# EAGLE board bend_it_board_v_2_E (EAGLE 9.3.1)
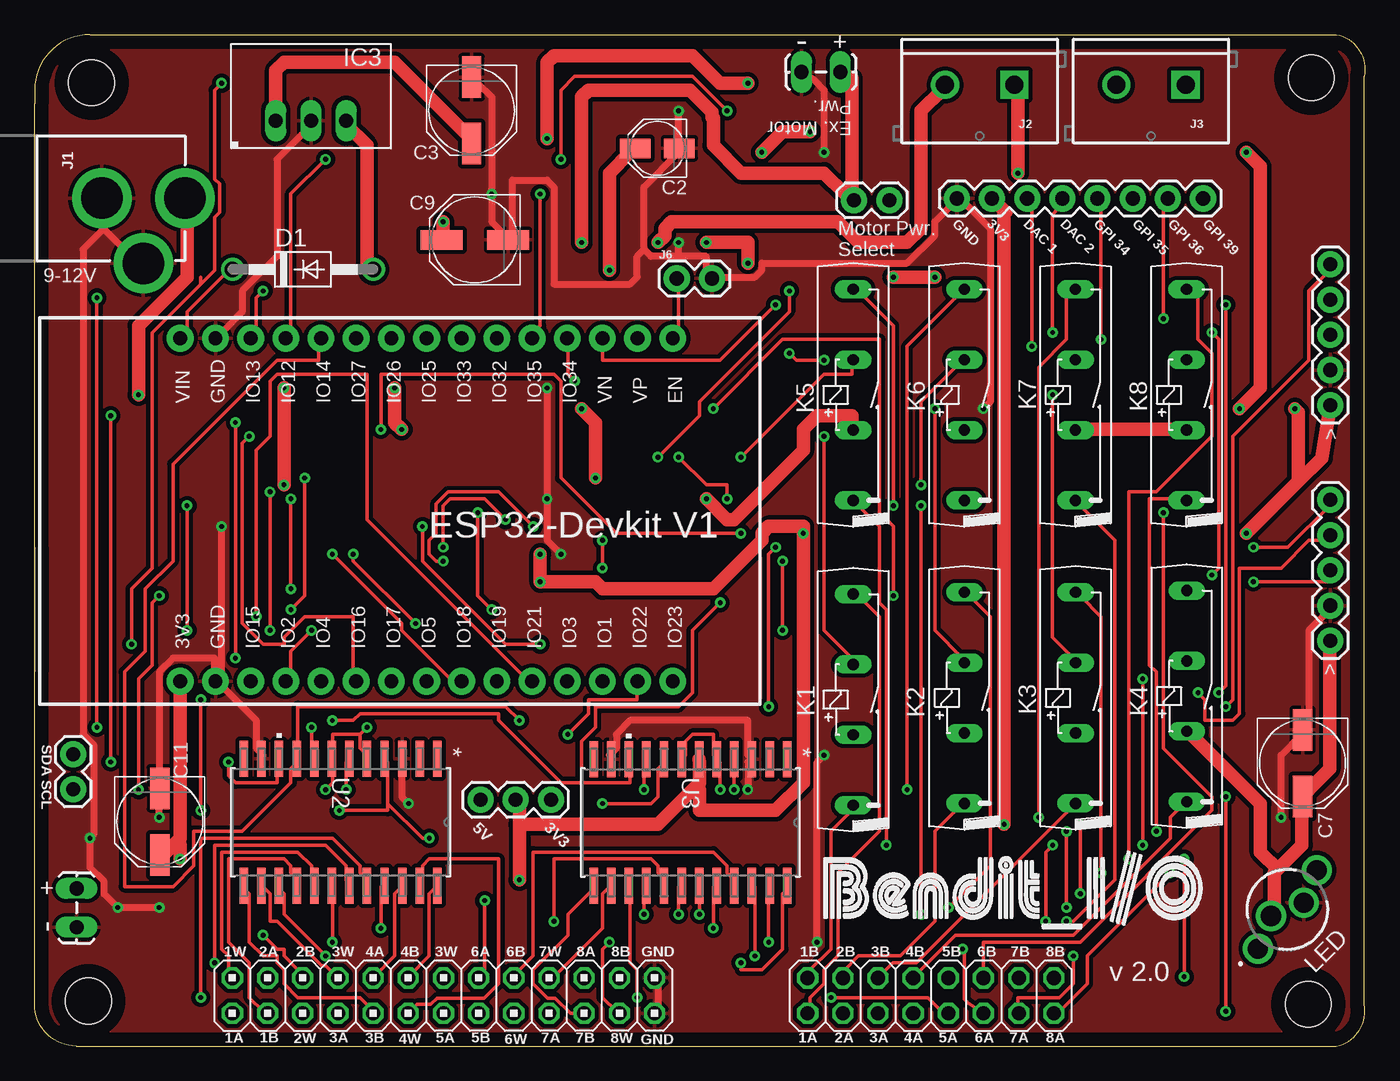
[diagram p0: board, top side]
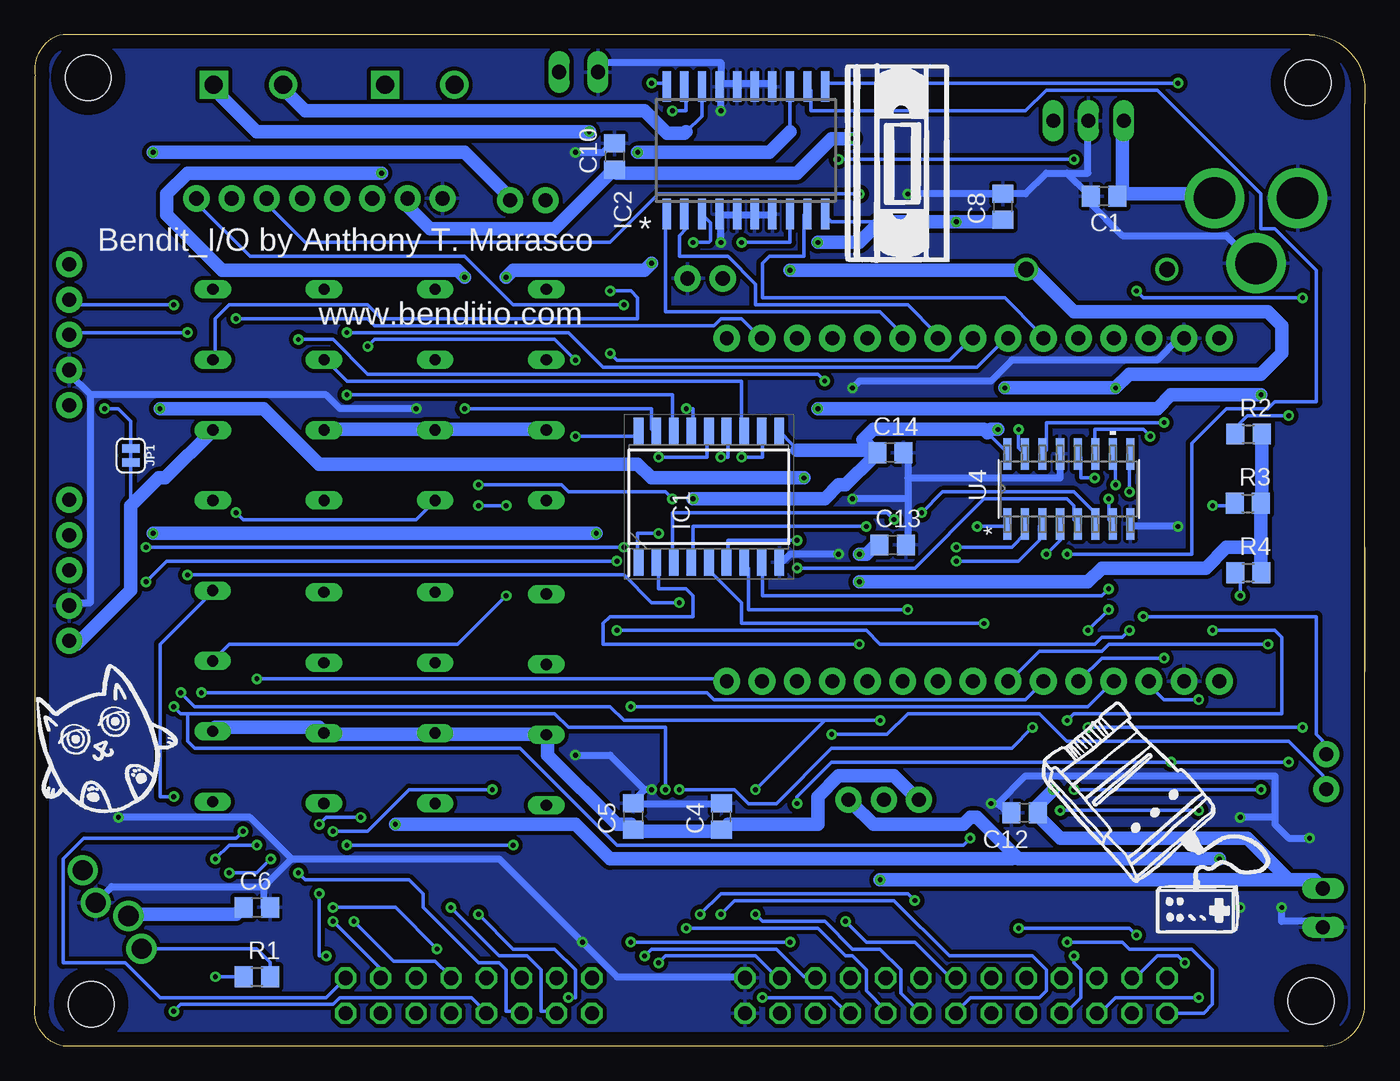
[diagram p1: board, bottom side, seen from below]

Size 96.05 x 73 mm. Coordinates in mm from the lower left corner, seen from the top.
Outline: 0,36 0,27
Outline: 3,0 94,0 arc90 96,3 96,70 arc90 94,73 4,73 arc90 0,69 0,68 0,3 arc90 3,0
Copper layers (1*16): Top 0.035mm / dielectric 1.5mm / Bottom 0.035mm
Design rules "default": minimum track width 6mil, minimum drill 0.35mm, track to track 6mil, track to pad 6mil, pad to pad 6mil, via to via 6mil, smd to smd 6mil, copper to edge 40mil, drill to drill 6mil, minimum pad ring 10mil, minimum via ring 8mil, stop-mask expansion 4mil, vias tented up to drill 0mil, thermal gap 10mil
Net classes: 0 default: width 0.254 mm, clearance 0.203 mm; 1 PWR: width 0.991 mm, clearance 0.203 mm; 2 GND: width 0.508 mm, clearance 0.203 mm

## Footprints (pad centres in the part's own frame; a part is rotated, then mirrored left to right if it is on the bottom)
C0805 = smd 1.3 x 1.5: 1 -0.95,0; 2 0.95,0
PANASONIC_B = smd 2.2 x 1.4: + 1.6,0; - -1.6,0
PANASONIC_D = smd 3 x 1.4: + 2.4,0; - -2.4,0
DO41-10 = drill 1.118: A 5.08,0; C -5.08,0
STAND-OFF = hole 3.302: 0,0
SOIC127P1032X285-18N = smd 1.95 x 0.7: 1 -4.725,5.08; 2 -4.725,3.81; 3 -4.725,2.54; 4 -4.725,1.27; 5 -4.725,0; 6 -4.725,-1.27; 7 -4.725,-2.54; 8 -4.725,-3.81; 9 -4.725,-5.08; 10 4.725,-5.08; 11 4.725,-3.81; 12 4.725,-2.54; 13 4.725,-1.27; 14 4.725,0; 15 4.725,1.27; 16 4.725,2.54; 17 4.725,3.81; 18 4.725,5.08
SO20 = smd 0.6 x 2.2: 1 -5.715,-4.6; 2 -4.445,-4.6; 3 -3.175,-4.6; 4 -1.905,-4.6; 5 -0.635,-4.6; 6 0.635,-4.6; 7 1.905,-4.6; 8 3.175,-4.6; 9 4.445,-4.6; 10 5.715,-4.6; 11 5.715,4.6; 12 4.445,4.6; 13 3.175,4.6; 14 1.905,4.6; 15 0.635,4.6; 16 -0.635,4.6; 17 -1.905,4.6; 18 -3.175,4.6; 19 -4.445,4.6; 20 -5.715,4.6
SIP3 = drill 1 long: 1 -2.54,0; 2 0,0; 3 2.54,0
POWER_JACK_PTH = drill 2.997 pad 4.318: GND 0,7.7; GNDBREAK 4.7,10.7; PWR 0,13.7
SCREWTERMINAL-5MM-2 = drill 1.3 pad 2.032 square: 1 0,0 | drill 1.3 pad 2.032: 2 5,0
1X03 = drill 1.016 pad 1.88: 1 0,0; 2 2.54,0; 3 5.08,0
1X08 = drill 1.016 pad 1.88: 1 0,0; 2 2.54,0; 3 5.08,0; 4 7.62,0; 5 10.16,0; 6 12.7,0; 7 15.24,0; 8 17.78,0
1X02 = drill 1.016 pad 1.88: 1 0,0; 2 2.54,0
1X05 = drill 1.016 pad 1.88: 1 0,0; 2 2.54,0; 3 5.08,0; 4 7.62,0; 5 10.16,0
1X02_LOCK_LONGPADS = drill 1.016 long: 1 -0.127,0; 2 2.667,0
SMT-JUMPER_2_NC_TRACE_SILK = smd 0.635 x 1.27: 1 -0.508,0; 2 0.508,0
2X08 = drill 1.016 octagon: 1 -8.89,-1.27; 2 -8.89,1.27; 3 -6.35,-1.27; 4 -6.35,1.27; 5 -3.81,-1.27; 6 -3.81,1.27; 7 -1.27,-1.27; 8 -1.27,1.27; 9 1.27,-1.27; 10 1.27,1.27; 11 3.81,-1.27; 12 3.81,1.27; 13 6.35,-1.27; 14 6.35,1.27; 15 8.89,-1.27; 16 8.89,1.27
2X13 = drill 1.016 octagon: 1 -15.24,-1.27; 2 -15.24,1.27; 3 -12.7,-1.27; 4 -12.7,1.27; 5 -10.16,-1.27; 6 -10.16,1.27; 7 -7.62,-1.27; 8 -7.62,1.27; 9 -5.08,-1.27; 10 -5.08,1.27; 11 -2.54,-1.27; 12 -2.54,1.27; 13 0,-1.27; 14 0,1.27; 15 2.54,-1.27; 16 2.54,1.27; 17 5.08,-1.27; 18 5.08,1.27; 19 7.62,-1.27; 20 7.62,1.27; 21 10.16,-1.27; 22 10.16,1.27; 23 12.7,-1.27; 24 12.7,1.27; 25 15.24,-1.27; 26 15.24,1.27
HE3621 = drill 0.813 long: 1 -7.62,0; 2 -2.54,0; 3 2.54,0; 4 7.62,0
1938 = drill 1.45 pad 2.15: 1 -3.5,-0.5; 2 -1.167,0.5; 3 1.167,-0.5; 4 3.5,0.5
R0805 = smd 1.3 x 1.5: 1 -0.95,0; 2 0.95,0
RW_24-M = smd 2.603 x 0.61: 1 -4.578,6.985; 2 -4.578,5.715; 3 -4.578,4.445; 4 -4.578,3.175; 5 -4.578,1.905; 6 -4.578,0.635; 7 -4.578,-0.635; 8 -4.578,-1.905; 9 -4.578,-3.175; 10 -4.578,-4.445; 11 -4.578,-5.715; 12 -4.578,-6.985; 13 4.578,-6.985; 14 4.578,-5.715; 15 4.578,-4.445; 16 4.578,-3.175; 17 4.578,-1.905; 18 4.578,-0.635; 19 4.578,0.635; 20 4.578,1.905; 21 4.578,3.175; 22 4.578,4.445; 23 4.578,5.715; 24 4.578,6.985
SOIC-16-M = smd 2.261 x 0.584: 1 -2.527,4.445; 2 -2.527,3.175; 3 -2.527,1.905; 4 -2.527,0.635; 5 -2.527,-0.635; 6 -2.527,-1.905; 7 -2.527,-3.175; 8 -2.527,-4.445; 9 2.527,-4.445; 10 2.527,-3.175; 11 2.527,-1.905; 12 2.527,-0.635; 13 2.527,0.635; 14 2.527,1.905; 15 2.527,3.175; 16 2.527,4.445
ESP32-DEVKITV1 = drill 1 pad 1.93: 1 -22.87,-13.54; 2 -20.33,-13.54; 3 -17.79,-13.54; 4 -15.25,-13.54; 5 -12.71,-13.54; 6 -10.17,-13.54; 7 -7.63,-13.54; 8 -5.09,-13.54; 9 -2.55,-13.54; 10 -0.01,-13.54; 11 2.53,-13.54; 12 5.07,-13.54; 13 7.61,-13.54; 14 10.15,-13.54; 15 12.69,-13.54; 16 12.69,11.23; 17 10.15,11.23; 18 7.61,11.23; 19 5.07,11.23; 20 2.53,11.23; 21 -0.01,11.23; 22 -2.55,11.23; 23 -5.09,11.23; 24 -7.63,11.23; 25 -10.17,11.23; 26 -12.71,11.23; 27 -15.25,11.23; 28 -17.79,11.23; 29 -20.33,11.23; 30 -22.87,11.23

## Placement (x,y rotation side)
C1  1uf  [C0805]  18.83,61.34 180 bottom
C2  10uF  [PANASONIC_B]  44.96,64.79 180 top
C3  33uF  [PANASONIC_D]  31.55,67.53 270 top
C4  0.1uf  [C0805]  46.45,16.56 90 bottom
C5  10uf  [C0805]  52.83,16.56 90 bottom
C6  0.1uf  [C0805]  80,10 0 bottom
C7  100uF  [PANASONIC_D]  91.55,20.42 270 top
C8  0.1uf  [C0805]  26.13,60.58 90 bottom
C9  100uF  [PANASONIC_D]  31.78,58.19 180 top
C10  0.1uf  [C0805]  54.17,64.21 90 bottom
C11  100uF  [PANASONIC_D]  9.04,16.2 270 top
C12  0.1uf  [C0805]  24.56,16.83 180 bottom
C13  0.1uf  [C0805]  34.09,36.17 0 bottom
C14  0.1uf  [C0805]  34.26,42.83 0 bottom
D1  1N4001  [DO41-10]  19.38,56.06 0 top
H1  STAND-OFF  [STAND-OFF]  91.96,3.01 0 top
H2  STAND-OFF  [STAND-OFF]  4.11,69.52 0 top
H3  STAND-OFF  [STAND-OFF]  3.89,3.25 0 top
H4  STAND-OFF  [STAND-OFF]  92.17,69.9 0 top
IC1  [SOIC127P1032X285-18N]  47.36,39.64 90 bottom
IC2  L293DD  [SO20]  44.69,64.64 0 bottom
IC3  R-785.0-1.0  [SIP3]  19.95,66.79 0 top
J1  Main Power  [POWER_JACK_PTH]  -2.84,61.2 270 top
J2  MOTOR 1  [SCREWTERMINAL-5MM-2]  70.74,69.37 180 top
J3  MOTOR 2  [SCREWTERMINAL-5MM-2]  83.11,69.37 180 top
J4  Pot Pwr. Select  [1X03]  37.28,17.78 180 top
J5  Extra I/O  [1X08]  66.58,61.17 0 top
J6  RESET  [1X02]  46.37,55.4 0 top
J7  Switch Extention  [1X05]  93.54,29.25 90 top
J8  Pot Extention  [1X05]  93.54,46.25 90 top
J9  Motor Pwr. Sel.  [1X02]  59.17,61.05 0 top
J10  EXT. POT VIN  [1X02_LOCK_LONGPADS]  3.03,8.7 90 top
J11  Ext. Motor Pwr.  [1X02_LOCK_LONGPADS]  55.51,70.3 0 top
J12  I2C  [1X02]  2.79,21.07 270 top
JP1  POT PWR  [SMT-JUMPER_2_NC_TRACE_SILK]  89.11,42.62 270 bottom
JP2  S  [2X08]  64.71,3.64 0 top
JP4  P  [2X13]  29.52,3.64 0 top
K1  HE3621  [HE3621]  59.11,25 90 top
K2  HE3621  [HE3621]  67.14,25.13 90 top
K3  HE3621  [HE3621]  75.16,25.13 90 top
K4  HE3621  [HE3621]  83.19,25.25 90 top
K5  HE3621  [HE3621]  59.11,47 90 top
K6  HE3621  [HE3621]  67.13,47 90 top
K7  HE3621  [HE3621]  75.15,47 90 top
K8  HE3621  [HE3621]  83.17,47 90 top
LED  NP_5MM  [1938]  90.45,9.86 45 top
R1  470R  [R0805]  80,5 0 bottom
R2  10K  [R0805]  8.41,44.17 0 bottom
R3  10K  [R0805]  8.45,39.17 0 bottom
R4  1K  [R0805]  8.42,34.17 0 bottom
U2  AD5204BRZ100RW_24-M  [RW_24-M]  22.1,16.15 270 top
U3  AD5204BRZ100RW_24-M  [RW_24-M]  47.35,16.13 270 top
U4  MC74HC595ADR2GSOIC-16-M  [SOIC-16-M]  21.37,40.21 90 bottom
U$1  ESP32DEVKITV1  [ESP32-DEVKITV1]  33.38,39.86 0 top

## Library data of the parts
C1 C4-C6 C8 C10 C12-C14 R1-R4 = rcl
C2 C3 C7 C9 C11 = rcl; SPICEPREFIX: C
D1 = tango
H1-H4 = SparkFun-Hardware
IC1 = 2821; DESCRIPTION: Gate Drivers DMOS Transistor Array 8-CH, 50V/0.5A; HEIGHT: 2.85mm; MANUFACTURER_NAME: Toshiba; MANUFACTURER_PART_NUMBER: TBD62083AFWG,EL; MOUSER_PART_NUMBER: 757-TBD62083AFWGEL; MOUSER_PRICE-STOCK: https://www.mouser.com/Search/Refine.aspx?Keyword=757-TBD62083AFWGEL
IC2 = st-microelectronics; OC_FARNELL: unknown
IC3 = r-78xx_10; MF: Recom; MPN: R-785.0-1.0; OC_FARNELL: 1793143; OC_NEWARK: 62X9542
J1 = SparkFun-Connectors; PROD_ID: CONN-08197
J2 J3 = SparkFun-Connectors; SF_SKU: PRT-08432
J4 J6-J12 = SparkFun-Connectors
J5 = SparkFun-Connectors; PROD_ID: CONN-08438
JP1 = SparkFun-Jumpers
JP2 JP4 = pinhead
K1-K8 = relay; MF: HAMLIN; MPN: HE3621A2410; OC_FARNELL: 9561943; OC_NEWARK: 50F7993
LED = 1938; DESCRIPTION: ADAFRUIT - 1938 - LED Color:Red, Green, Blue; HEIGHT: mm; MANUFACTURER_NAME: Adafruit; MANUFACTURER_PART_NUMBER: 1938; MOUSER_PART_NUMBER: 485-1938; MOUSER_PRICE-STOCK: https://www.mouser.com/Search/Refine.aspx?Keyword=485-1938; RS_PART_NUMBER: 485-1938; RS_PRICE-STOCK: https://www.mouser.com/Search/Refine.aspx?Keyword=485-1938
U2 U3 = AD5204BR100; MANUFACTURER_PART_NUMBER: AD5204BRZ100; VENDOR: Analog Devices Inc
U4 = MC74HC595; MANUFACTURER_PART_NUMBER: MC74HC595ADR2G; VENDOR: ON Semiconductor
U$1 = ESP32-DEVKITV1

## Nets
3V3 [PWR]: C10.1 C11.+ IC2.20 J4.1 J5.2 U$1.1
5V [PWR]: C2.+ C4.1 C5.1 C6.1 C7.+ C14.1 D1.A IC1.10 IC3.3 J4.3 J7.1 JP1.2 K1.2 K2.2 K3.2 K4.2 K5.2 K6.2 K7.2 K8.2 LED.2 U4.10 U4.16
CLK_SPI: J8.4 U2.9 U3.9 U$1.26
CS_SPI: J8.5 U2.4 U3.4 U$1.3
DAC1: J5.3 U$1.23
DAC2: J5.4 U$1.24
DI_PIX: R1.1 U$1.15
DP_1_A: JP4.1 U2.18
DP_1_B: JP4.3 U2.16
DP_1_W: JP4.2 U2.17
DP_2_A: JP4.4 U2.19
DP_2_B: JP4.6 U2.21
DP_2_W: JP4.5 U2.20
DP_3_A: JP4.7 U2.15
DP_3_B: JP4.9 U2.13
DP_3_W: JP4.8 U2.14
DP_4_A: JP4.10 U2.22
DP_4_B: JP4.12 U2.24
DP_4_W: JP4.11 U2.23
DP_5_A: JP4.13 U3.18
DP_5_B: JP4.15 U3.16
DP_5_W: JP4.14 U3.17
DP_6_A: JP4.16 U3.19
DP_6_B: JP4.18 U3.21
DP_6_W: JP4.17 U3.20
DP_7_A: JP4.19 U3.15
DP_7_B: JP4.21 U3.13
DP_7_W: JP4.20 U3.14
DP_8_A: JP4.22 U3.22
DP_8_B: JP4.24 U3.24
DP_8_W: JP4.23 U3.23
DP_DATA: R2.1 U2.10 U3.8
DP_DATA_EXT: J8.3 R3.1 U3.10
DP_VIN [PWR]: C12.1 C13.1 J4.2 J8.1 J10.2 JP1.1 R2.2 R3.2 R4.2 U2.6 U3.6
GND [GND]: C1.2 C2.- C3.- C4.2 C5.2 C6.2 C7.- C8.2 C9.- C10.2 C11.- C12.2 C13.2 C14.2 IC1.9 IC2.4 IC2.5 IC2.6 IC2.7 IC2.14 IC2.15 IC2.16 IC2.17 IC3.2 J1.GND J1.GNDBREAK J5.1 J6.2 J7.2 J8.2 J10.1 J11.1 JP4.25 JP4.26 LED.3 U2.3 U2.11 U3.3 U3.11 U4.8 U4.13 U$1.2 U$1.29
GPI_34: J5.5 U$1.19
GPI_35: J5.6 U$1.20
GPI_36: J5.7 U$1.17
GPI_39: J5.8 U$1.18
I2C_SCL: J12.2 U$1.14
I2C_SDA: J12.1 U$1.11
J1: JP2.1 K1.4
J2: JP2.2 K1.1
J3: JP2.3 K2.4
J4: JP2.4 K2.1
J5: JP2.5 K3.4
J6: JP2.6 K3.1
J7: JP2.7 K4.4
J8: JP2.8 K4.1
J9: JP2.9 K5.4
J10: JP2.10 K5.1
J11: JP2.11 K6.4
J12: JP2.12 K6.1
J13: JP2.13 K7.4
J14: JP2.14 K7.1
J15: JP2.15 K8.4
J16: JP2.16 K8.1
MAIN_VIN [PWR]: C1.1 C3.+ IC3.1 J1.PWR J9.2
MO_1_EN: IC2.1 U$1.21
MO_1_IN_1: IC2.2 U$1.22
MO_1_IN_2: IC2.9 U$1.25
MO_2_EN: IC2.11 U$1.7
MO_2_IN_1: IC2.12 U$1.9
MO_2_IN_2: IC2.19 U$1.27
MOSI_SPI: U2.8 U$1.28
MOTOR_1_OUT [PWR]: IC2.3 J2.1
MOTOR_2_OUT [PWR]: IC2.8 J2.2
MOTOR_3_OUT [PWR]: IC2.13 J3.1
MOTOR_4_OUT [PWR]: IC2.18 J3.2
MOTOR_VIN [PWR]: C8.1 C9.+ IC2.10 J9.1 J11.2
N$1: D1.C U$1.30
N$11: LED.1 R1.2
O1: IC1.18 K1.3
O2: IC1.17 K2.3
O3: IC1.16 K3.3
O4: IC1.15 K4.3
O5: IC1.14 K5.3
O6: IC1.13 K6.3
O7: IC1.12 K7.3
O8: IC1.11 K8.3
PR/SHDN: R4.1 U2.5 U2.7 U3.5 U3.7
RST: J6.1 U$1.16
SH_1: IC1.1 U4.15
SH_2: IC1.2 U4.1
SH_3: IC1.3 U4.2
SH_4: IC1.4 U4.3
SH_5: IC1.5 U4.4
SH_6: IC1.6 U4.5
SH_7: IC1.7 U4.6
SH_8: IC1.8 U4.7
SH_CLK: J7.4 U4.11 U$1.6
SH_DATA: U4.14 U$1.5
SH_DATA_OUT: J7.3 U4.9
SH_LATCH: J7.5 U4.12 U$1.4

## Tracks (layer width: path | path; a pad name or v marks a point on that pad's centre or on a via)
3V3  (via drill 0.35)
  Top 0.991: v51.5,69.5 49.5,69.5 47.51,71.49 37.49,71.49 37,71 v37,65.5 | 10.25,14.75 10.5,15 10.5,26 U$1.1 | 10.25,14.75 9.5,14 C11.+ | v10.5,13.5 10.5,14.5 10.25,14.75 | v70,16 70,60.19 70.12,60.17 J5.2
  Bottom 0.254: v51.5,69.5 50.5,69.5 IC2.20
  Bottom 0.991: J5.2 69.04,60.54 67.5,59 58.5,59 54.5,63 C10.1 54,63 41,63 38.5,65.5 v37,65.5 | 25.25,13.75 25,13.5 v10.5,13.5 | 25.25,13.75 28,16.5 28.5,16.5 29,16 35.5,16 37,17.5 J4.1 | v70,16 57,16 54.5,13.5 25.5,13.5 25.25,13.75
5V  (via drill 0.35)
  Top 0.991: v41.5,56 41.5,63 43,64.5 C2.+ | v18,47.5 v18,40.5 | IC3.3 22.5,66.5 24,65 24,56.5 D1.A | v26.5,44.5 26,45 v26,47.5 | 89.75,12.75 89.5,12.5 89.5,9.5 LED.2 | 89.75,12.75 91.5,14.5 91.5,18 C7.+ 92,18.5 93.5,20 93.5,29 J7.1 | K7.2 75.5,44.5 83,44.5 K8.2 | 89.75,12.75 88.5,14 88.5,17.5 83.5,22.5 K4.2 | v48.5,39.5 50,38 50.5,38 55.5,43 55.5,44.5 56.5,45.5 59,45.5 59,44.5 K5.2
  Bottom 0.254: JP1.2 89.11,39 | 93,29 93.29,29 J7.1 | IC1.10 41.28,43.37 41,43 | 27.25,44.25 26,43 U4.16 | v18,40.5 18,42.5 U4.10
  Bottom 0.991: 93,29 89.11,32.89 89.11,39 87.11,41 86.63,41 K8.2 | 35.5,43 36.25,43.75 35.5,44.5 27.5,44.5 27.25,44.25 27,44.5 v26.5,44.5 | 41,43 35.5,43 | 35.5,43 C14.1 35.5,42.5 37.5,40.5 38,40.5 39,39.5 v48.5,39.5 | v41.5,56 24.5,56 D1.A 24,56 21,53 7,53 6,52 6,50 7.5,48.5 17,48.5 v18,47.5 v26,47.5 | K4.2 83,23 75.5,23 K3.2 75,22.5 67.5,22.5 K2.2 67,22.5 59.5,22.5 K1.2 59,22 59,21 54,16 53,16 C5.1 52.5,15.5 46.5,15.5 C4.1 46,16 39.5,16 39.5,18 38,19.5 34,19.5 32.5,18 J4.3 | C6.1 81,10 81.5,9.5 89,9.5 LED.2 | K5.2 59.5,44.5 67,44.5 K6.2 67.5,44.5 75,44.5 K7.2
CLK_SPI  (via drill 0.35)
  Top 0.254: U$1.26 20.5,51 20.5,49.5 17.5,49.5 10,42 10,35 8,33 8,28.5 6.5,27 6.5,16 6.5,11.5 10,11.5 11.5,13 11.5,15.5 15,15.5 18.5,19 18.5,20 19,20.5 U2.9 19,21 19,24.5 34,24.5 v35,23.5 | v44,18.5 44,20.5 U3.9 | v86,53.5 86,26 v85.5,25.5
  Bottom 0.254: 39,23.5 v44,18.5 | v35,23.5 39,23.5 | v86,53.5 93.5,53.5 J8.4 | v85.5,25.5 84.5,24.5 54.5,24.5 53.5,23.5 39,23.5
CS_SPI  (via drill 0.35)
  Top 0.254: v50.5,18.5 50.5,20.5 U3.4 | v86,24.5 86.5,25 86.5,44 92,49.5 92,54.5 93.5,56 J8.5 | 25.5,17.5 25.5,20.5 U2.4 | 25.5,17.5 28,15 v28.5,15 | v12,17 v12,25 | v22,17 25.5,17 25.5,17.5
  Bottom 0.254: v50.5,18.5 50.5,23 57.5,23 58.5,24 85,24 | 85,24 85.5,24 v86,24.5 | v28.5,15 29,14.5 54,14.5 61,21.5 84.5,21.5 85,22 85,24 | v12,25 14.5,25 15.5,26 U$1.3 | v22,17 v12,17
DAC1  (via drill 0.35)
  Top 0.254: v72,50.5 72,60.84 J5.3 | v57,49.5 55,49.5 v54.5,50
  Bottom 0.254: v72,50.5 71.5,51 58.5,51 v57,49.5 | v54.5,50 54,49.5 30,49.5 28.5,51 U$1.23
DAC2  (via drill 0.35)
  Top 0.254: v73.5,51.5 73.5,60 73.67,60.17 J5.4
  Bottom 0.254: v73.5,51.5 57.5,51.5 55,49 28,49 26,51 U$1.24
DI_PIX  (via drill 0.35)
  Top 0.254: v83,13.5 v83,5 | v80,26.5 v80,14.5
  Bottom 0.254: v83,5 R1.1 | v83,13.5 82,14.5 v80,14.5 | v80,26.5 46.5,26.5 U$1.15
DP_1_A  (via drill 0.35)
  Top 0.254: v21.5,7.5 21.5,11.5 U2.18
  Bottom 0.254: v21.5,7.5 17.5,7.5 17,7 12.5,7 11,5.5 11,3 11.63,2.37 JP4.1 14,2.5
DP_1_B
  Top 0.254: U2.16 19,12 18.5,12.5 18.5,13 18,13.5 14,13.5 14,7.5 15.5,6 15.5,3.5 16.5,2.5 JP4.3
DP_1_W
  Top 0.254: U2.17 20,12 20,13 19,14 13.5,14 13.5,7 14,6.5 14,5 JP4.2
DP_2_A  (via drill 0.35)
  Top 0.254: v13,6 13,14.5 21,14.5 22.5,13 22.5,12 U2.19
  Bottom 0.254: v13,6 13.5,6.5 15,6.5 16.5,5 JP4.4
DP_2_B  (via drill 0.35)
  Top 0.254: v25,8.5 25,11.5 U2.21 | v16.5,8 17.5,7 18,7 18,6.5 19,5.5 19,5 JP4.6
  Bottom 0.254: v25,8.5 17,8.5 v16.5,8
DP_2_W  (via drill 0.35)
  Top 0.254: v12,3.5 12,15 21.5,15 23.5,13 23.5,12.5 24,12 U2.20
  Bottom 0.254: v12,3.5 18,3.5 19,2.5 JP4.5
DP_3_A  (via drill 0.35)
  Top 0.254: v21,6.5 18,9.5 18,11 17.5,11.5 U2.15
  Bottom 0.254: v21,6.5 21,6 20.5,5.5 20.5,3.5 21.63,2.37 JP4.7
DP_3_B
  Top 0.254: U2.13 15,11.5 15.5,11 15.5,7.5 16.5,6.5 17.5,6.5 17.5,6 18,5.5 18,4.5 19,3.5 23.5,3.5 24.44,2.56 JP4.9
DP_3_W
  Top 0.254: U2.14 16.5,11.5 17,11 17,9 17.5,9 20.71,5.79 21,5.79 21.88,4.91 JP4.8
DP_4_A
  Top 0.254: U2.22 26.5,11.5 26,11 26,6.5 24.5,5 JP4.10
DP_4_B
  Top 0.254: U2.24 29,11.5 28.5,11 28.5,6.5 27,5 JP4.12
DP_4_W
  Top 0.254: U2.23 28,12 28,13 28.5,13.5 33.5,13.5 33.5,4.5 32.46,3.46 29.07,3.46 28.6,3 27.61,3 JP4.11
DP_5_A  (via drill 0.35)
  Top 0.254: v46.5,9.5 46.5,11.5 U3.18
  Bottom 0.254: v46.5,9.5 45.5,10.5 34,10.5 30,6.5 24,6.5 23,5.5 23,4 23.5,3.5 28.5,3.5 29.5,2.5 JP4.13
DP_5_B  (via drill 0.35)
  Top 0.254: v44,9.5 44,11.5 U3.16
  Bottom 0.254: v44,9.5 43.5,9 39,9 37,7 35,7 33.5,5.5 33.5,3.81 JP4.15
DP_5_W  (via drill 0.35)
  Top 0.254: v37.5,9 37.5,13.5 44.5,13.5 45,13 45,12.5 45.5,12 U3.17
  Bottom 0.254: v37.5,9 36,7.5 32.5,7.5 30,5 JP4.14
DP_6_A  (via drill 0.35)
  Top 0.254: v48,9.5 48,11.5 U3.19 | v32.5,10.5 32.5,5 JP4.16
  Bottom 0.254: v48,9.5 46.5,11 33,11 v32.5,10.5
DP_6_B
  Top 0.254: U3.21 50.5,12 50,12.5 50,13 49,14 36,14 36,6.5 35,5.5 35,5 JP4.18
DP_6_W  (via drill 0.35)
  Top 0.254: v49,8.5 49,11.5 U3.20
  Bottom 0.254: v49,8.5 39.5,8.5 37.5,6.5 37,6.5 36,5.5 36,4 34.6,2.6 JP4.17
DP_7_A  (via drill 0.35)
  Top 0.254: v43.5,3.5 43.5,5.5 43,6 43,11.5 U3.15
  Bottom 0.254: v43.5,3.5 38.5,3.5 37.5,2.5 JP4.19
DP_7_B
  Top 0.254: U3.13 40.5,11.5 38.5,9.5 38.5,8 36,5.5 36,4.5 36.75,3.75 37,3.5 37.04,3.46 37.59,3.46 38.69,2.37 JP4.21
DP_7_W
  Top 0.254: U3.14 41.5,11.5 41,11 41,8.5 37.5,5 JP4.20
DP_8_A  (via drill 0.35)
  Top 0.254: v52,6.5 52,11.5 U3.22
  Bottom 0.254: v52,6.5 51.5,7 42.5,7 40.5,5 40,5 JP4.22
DP_8_B  (via drill 0.35)
  Top 0.254: v51,6 51,5.5 52.5,5.5 54,7 54,11 54.5,11.5 U3.24
  Bottom 0.254: v51,6 50.5,6.5 44,6.5 42.5,5 JP4.24
DP_8_W  (via drill 0.35)
  Top 0.254: v53,7.5 53,11.5 U3.23 | v41.5,7.5 41,7 41,3.5 42,2.5 JP4.23
  Bottom 0.254: v41.5,7.5 v53,7.5
DP_DATA  (via drill 0.35)
  Top 0.254: v5.5,20.5 v5.5,45.5 | v14,20.5 14,19.5 14.5,19 17.5,19 17.5,20.5 U2.10 | v41,17.5 44.5,17.5 45,18 45,20 45.5,20.5 U3.8
  Bottom 0.254: v5.5,45.5 8.5,45.5 9.12,44.88 R2.1 | v5.5,20.5 v14,20.5 38.5,20.5 41,18 v41,17.5
DP_DATA_EXT  (via drill 0.35)
  Top 0.254: v11,30 v11,39 | v21.5,23.5 23,23.5 23.5,24 33.5,24 33.5,23.5 38,19 39.5,19 | 39.5,19 43,19 43,20.5 U3.10 | v85,51.5 85.5,51 85.5,34.5 v85,34 | v49.5,32 47.5,30 47.5,25.5 46.5,24.5 40.5,24.5 40.5,23 39.5,22 39.5,19
  Bottom 0.254: v11,39 9.87,39 R3.1 | v11,30 6.5,30 6,29.5 6,24 21,24 v21.5,23.5 | v85,51.5 93.5,51.5 J8.3 | v85,34 53.5,34 51.5,32 v49.5,32
DP_VIN  (via drill 0.35)
  Top 0.254: v22.5,18.5 22.5,20.5 U2.6
  Top 0.991: v36.5,35.5 v36.5,33.5 40.5,33.5 41,33 49,33 52.5,36.5 52.5,37 53,37.5 55.5,37.5 v55.5,37 55.5,19 53.5,17 48,17 48,18.5 47.75,18.75 | 47.75,18.75 45,16 35,16 | 47.75,18.75 48,19 48,20.5 U3.6 | 35,16 35,17.5 J4.2 | v87.5,37 91.25,40.75 | 91.25,40.75 92.94,42.44 J8.1 | 35,16 v35,12 | 91.25,40.75 91.25,45.75 v91,46
  Bottom 0.254: JP1.1 89.11,45.11 90,46 v91,46
  Bottom 0.991: R3.2 7.5,36 | 7.5,36 7.5,34.5 R4.2 | R3.2 | v36.5,35.5 36,35.5 35.5,36 C13.1 | v36.5,33.5 20,33.5 19,34.5 11.5,34.5 10,36 7.5,36 | v22.5,18.5 23.61,17.39 C12.1 23.5,16.5 22,15 8.5,15 5.75,12.25 6,12 | v55.5,37 v87.5,37 | v35,12 6,12 | R2.2 7.46,39.21 R3.2 | 6,12 3.66,12 J10.2
GND  (via drill 0.35)
  Top 0.508: J7.2 93.5,31.5 92,30 92,23 C7.- 91.5,22.5 90,21 v90,16.5 | U3.11 41.5,21 42,21.5 42,22.5 43,23.5 51.5,23.5 51.5,21 U3.3 51.5,20.5 v51.5,18.5 | JP4.25 45,2.5 45,4.5 JP4.26 | v57,21 56.5,20.5 v56.5,7.5 | v13.5,37.5 13.5,26.5 U$1.2 | U2.11 16.5,21 16,21.5 16,23.5 13.5,26 U$1.2 | U$1.2 13,26.5 13,28 10,28 9,27 9,19 C11.- 9,18.5 v9,16.5 | v27,17.5 26.5,18 26.5,20.5 U2.3 | v57,64.5 57,69 56.27,69.73 J11.1 | 44,57.5 44,62 46.5,64.5 C2.- 46.5,65 v46.5,67.5 | 44,57.5 44.5,57 46.5,57 | 46.5,57 48.5,57 48.5,55.5 J6.2 49,55.5 52,55.5 52.5,56 52.5,56.5 63,56.5 65,58.5 65,59.5 66.58,61.08 J5.1 67.51,60.49 69,59 69,46.5 v68.5,46 | 46.5,57 v46.5,58 | v38,35.5 37,36.5 v37,39.5 v37,47.5 | 5,59 7.5,56.5 J1.GNDBREAK | 5,59 5,61 J1.GND | C3.- 32,69.5 33,68.5 v33,61.5 33,59.5 34,58.5 C9.- 34.5,58.5 34.5,62.5 37,62.5 37.5,62 37.5,55 43,55 43.5,55.5 43.5,57 44,57.5 | U$1.29 13.5,51.5 15,53 15,54.5 17.5,57 17.5,64 19.5,66 19.5,66.5 IC3.2 | 5,59 3.5,57.5 3.5,22.5 4.25,21.75 4.25,15.25 v4,15 4,12.88 5.01,11.88 5.01,10.99 v6,10 v9,10
  Bottom 0.508: 92,47 93.5,48.5 J8.2 | 92,47 92,32 93.5,32 J7.2 | C4.2 46.5,17.5 52.5,17.5 C5.2 52.5,18 52,18.5 | v51.5,18.5 52,18.5 | 79.5,11.5 79.5,10 C6.2 | 79.5,11.5 90.5,11.5 91.5,10.5 LED.3 | 77.5,13.5 62.5,13.5 v56.5,7.5 54,5 45,5 JP4.26 | 79.5,11.5 77.5,13.5 | 52,18.5 54.5,21 v57,21 | v90,16.5 80.5,16.5 77.5,13.5 | v13.5,37.5 17,37.5 U4.8 | 26.5,17.5 26,17 C12.2 | v27,17.5 26.5,17.5 | 6.5,16.5 6.5,19.5 24.5,19.5 26.5,17.5 | 6.5,16.5 6.5,16 5.5,15 v4,15 | 6.5,16.5 v9,16.5 | 44,69.5 43,69.5 IC2.14 | 46.5,69.5 45.5,69.5 | 45.5,69.5 44,69.5 | 44,69.5 IC2.15 | 45.5,69.5 IC2.16 | v57,64.5 55,64.5 54.5,65 C10.2 | 46.5,69.5 46.5,71 54.8,71 J11.1 | 46.5,69.5 IC2.17 46.5,69 v46.5,67.5 | 44,60 43,60 IC2.7 | 46.5,60 45.5,60 | 45.5,60 44,60 | 44,60 IC2.6 | 45.5,60 IC2.5 | v46.5,58 46.5,60 | 46.5,60 IC2.4 | 33,41 33,42.5 C14.2 | 33,41 33,39.5 | 33,39.5 33,36.5 C13.2 | v38,35.5 41.5,35.5 42,35 IC1.9 | 33,39.5 v37,39.5 | 33,41 22,41 22,42.5 U4.13 | 21.5,63 20,61.5 C1.2 20,61 17.5,58.5 10,58.5 8,56.5 J1.GNDBREAK | 21.5,63 23,63 24.5,61.5 27.65,61.5 | 21.5,63 20,63 20,66.5 IC3.2 | 27.65,61.5 v33,61.5 | 27.65,61.5 27.6,61.53 C8.2 | v37,47.5 36.5,48 27,48 25.5,49.5 15,49.5 13.5,51 U$1.29 | 92,47 75,47 74,46 v68.5,46 | J10.1 3.45,9 6,9 v6,10
  pour Top (isolate 0.305): 0,54 0,5 0,3 arc90 3,0 89,0 93,0 93.73,0 arc90 96,2.27 96,68 96,70.85 arc90 93.84,73.01 5,73 4,73 arc90 0,69
  pour Bottom (isolate 0.305): 0,3 0,69 arc-90 4,73 93.47,73 arc-90 96.12,70.34 96,3.79 96,2.27 arc-90 93.73,0 3,0 arc-90
GPI_34  (via drill 0.35)
  Top 0.254: v77,51 77,61.08 J5.5 | v39,48 38.5,48.5 38.5,51 U$1.19
  Bottom 0.254: v77,51 74.5,51 72,48.5 39.5,48.5 v39,48
GPI_35  (via drill 0.35)
  Top 0.254: v36.5,61.5 36.5,52 36,51.5 U$1.20
  Bottom 0.254: v36.5,61.5 51,61.5 54.5,58 76.5,58 79.14,60.64 J5.6
GPI_36  (via drill 0.35)
  Top 0.254: v81.5,52.5 81.5,60.5 81.72,60.73 J5.7
  Bottom 0.254: v81.5,52.5 72,52.5 71.5,52 47,52 46.5,52.5 45,52.5 44,51.5 U$1.17
GPI_39  (via drill 0.35)
  Top 0.254: v53.5,53.5 49.5,49.5 41,49.5 41,51 U$1.18
  Bottom 0.254: v53.5,53.5 61.5,53.5 65,57 80.5,57 84.29,60.79 J5.8
I2C_SCL  (via drill 0.35)
  Top 0.254: v38.5,22.5 40,24 40,25 43.5,25 43.5,26 U$1.14
  Bottom 0.254: v38.5,22.5 34.5,22.5 33,24 23.5,24 21.5,22 5.5,22 3.05,19.55 J12.2
I2C_SDA  (via drill 0.35)
  Top 0.254: v16,31 16,43 17,44 17,48 17.5,48.5 24,48.5 24,38 35.5,26.5 U$1.11
  Bottom 0.254: v16,31 3.5,31 3.5,22.5 3.08,22.08 J12.1
J1
  Top 0.254: K1.4 59.5,32.5 61,31 61,15.5 58,12.5 58,6.5 57,5.5 57,4.5 56,3.5 56,2.52 JP2.1
J2
  Top 0.254: K1.1 59,17 57.5,15.5 57.5,7 56,5.5 56,5.04 JP2.2
J3  (via drill 0.35)
  Top 0.254: v66,10 69,13 69,31 67.5,32.5 K2.4
  Bottom 0.254: v66,10 62.5,6.5 60.5,6.5 59.5,5.5 59.5,2.5 58.49,2.5 JP2.3
J4
  Top 0.254: K2.1 67,17.5 65,15.5 65,9 62.5,6.5 59.5,6.5 58.36,5.36 JP2.4 58.63,5.13
J5  (via drill 0.35)
  Top 0.254: v77,12.5 77,31 75.5,32.5 K3.4
  Bottom 0.254: v77,12.5 76.5,12 69,12 68,11 68,10 64,6 63.89,6 62.98,6 62.5,6 62,5.5 62,2.5 61.01,2.5 JP2.5
J6
  Top 0.254: 75,17.5 K3.1 63.66,6 61.99,6 JP2.6
J7  (via drill 0.35)
  Top 0.254: v86,2.5 v86,18
  Bottom 0.254: v86,18 87,18 87,29 83.5,32.5 K4.4 | v86,2.5 85.5,3 74.51,3 74.05,3.46 74.04,3.46 74,3.5 64.5,3.5 63.63,2.63 JP2.7
J8
  Top 0.254: K4.1 83,17.5 82,16.5 82,15 75,8 66.5,8 63.63,5.13 JP2.8
J9  (via drill 0.35)
  Top 0.254: v62,39 62,52 59.5,54.5 K5.4 | v64,9.5 v64,39 | v57.5,3.5 64.5,3.5 65.63,2.37 JP2.9
  Bottom 0.254: v64,39 v62,39 | v64,9.5 61.5,7 58.5,7 57,5.5 57,3.5 v57.5,3.5
J10  (via drill 0.35)
  Top 0.254: v61.5,14.5 61.5,31.5 61,32 61,37.5 59.5,39 K5.1 | v73.5,14.5 73,14 v73,9
  Bottom 0.254: v73.5,14.5 v61.5,14.5 | v73,9 70.13,6.13 67.13,6.13 66.13,5.13 JP2.10
J11  (via drill 0.35)
  Top 0.254: v63,18.5 63,50.5 67,54.5 K6.4 | v74.5,10 v74.5,15.5 | v67,7 67.13,6.87 67.13,3.37 67.39,3.11 JP2.11
  Bottom 0.254: v63,18.5 69,18.5 72,15.5 v74.5,15.5 | v74.5,10 70,10 v67,7
J12  (via drill 0.35)
  Top 0.254: v81.5,38.5 81.5,21.5 85,18 85,17 75.5,7.5 68.5,7.5 68.5,4.95 JP2.12
  Bottom 0.254: v81.5,38.5 81,38 68.5,38 67.5,39 K6.1
J13  (via drill 0.35)
  Top 0.254: v72.5,16.5 72.5,49 74.5,51 74.5,54 75,54.5 K7.4 | v75.5,11 v75.5,16 | v75,6.5 75,4.5 74,3.5 71,3.5 71,2.58 JP2.13
  Bottom 0.254: v72.5,16.5 75,16.5 v75.5,16 | v75.5,11 75.5,6.5 v75,6.5
J14  (via drill 0.35)
  Top 0.254: v74.5,9 75,9 78,12 78,36.5 75.5,39 K7.1
  Bottom 0.254: v74.5,9 70.63,5.13 JP2.14
J15  (via drill 0.35)
  Top 0.254: v79,13.5 79,40 81,40 85,44 85,50 84,51 84,54 83.5,54.5 K8.4 | v82,12.5 76,6.5 76,4.5 73.63,2.13 JP2.15
  Bottom 0.254: v79,13.5 80,12.5 v82,12.5
J16  (via drill 0.35)
  Top 0.254: v81,15.5 81,27 80.5,27.5 80.5,39.5 83,39.5 K8.1
  Bottom 0.254: v81,15.5 81.5,15 92.5,15 94,13.5 94,6 89.5,6 87,3.5 75,3.5 74,4.5 73.64,4.5 JP2.16
MAIN_VIN  (via drill 0.35)
  Top 0.991: C3.+ 31.5,65.5 26,71 18,71 17.41,70.42 IC3.1 17.5,67 | v87.5,64.5 88.5,63.5 88.5,47.5 v87,46 | v39.5,46 40.5,45 v40.5,41 | v7.5,47 7.5,52 11,55.5 11,61 J1.PWR
  Bottom 0.991: J1.PWR 11,61.5 17.5,61.5 C1.1 17.5,62 17.5,66.5 IC3.1 | v87.5,64.5 65,64.5 62,61.5 J9.2 | v87,46 79.5,46 75.5,42 52.5,42 51.5,41 v40.5,41 | v39.5,46 15,46 14,47 v7.5,47
MO_1_EN
  Bottom 0.254: IC2.1 50.5,60 50.5,53 35,53 33.5,51.5 U$1.21
MO_1_IN_1
  Bottom 0.254: IC2.2 49,60 49,59 49.5,58.5 49.5,57 46,57 44,55 44,53.5 33,53.5 31,51.5 U$1.22
MO_1_IN_2
  Bottom 0.254: IC2.9 40.5,60 40.5,57 43,57 43.5,56.5 43.5,54 26,54 23.5,51.5 U$1.25
MO_2_EN  (via drill 0.35)
  Top 0.254: 12,55 12,55.5 | 12,55 8.5,51.5 8.5,34.5 7,33 v7,29 | v13.5,69.5 13,69 13,62.57 13.35,62.23 13.35,60.16 13,59.82 13,56 12,55
  Bottom 0.254: v13.5,69.5 39,69.5 IC2.11 | v7,29 18.5,29 19,28.5 23.5,28.5 25.5,26.5 U$1.7
MO_2_IN_1  (via drill 0.35)
  Top 0.254: v21.5,35.5 26.5,30.5 26.5,30 30.5,26 U$1.9
  Bottom 0.254: v21.5,35.5 12.5,35.5 12.5,43.5 10,46 7,46 6.5,46.5 3.5,46.5 3.5,56 6.5,59 7.5,59 7.5,61.5 15,69 23,69 24.5,67.5 40,67.5 40,69 IC2.12
MO_2_IN_2  (via drill 0.35)
  Top 0.254: v50,67.5 47.5,70 39,70 38,69 v38,64 | v21,64 18.5,61.5 18.5,51.5 U$1.27
  Bottom 0.254: v50,67.5 49,67.5 49,69 IC2.19 | v21,64 v38,64
MOSI_SPI  (via drill 0.35)
  Top 0.254: v20,23 20,21 U2.8 | v4.5,54 v4.5,23 | v16.5,54.5 16,54 16,51.5 U$1.28
  Bottom 0.254: v4.5,23 v20,23 | v4.5,54 16,54 v16.5,54.5
MOTOR_1_OUT  (via drill 0.35)
  Top 0.991: v48.5,58 51.5,58 v51.5,56.5 | v65,55.5 v62,55.5 | v71,63 71,69 J2.1
  Bottom 0.254: IC2.3 47.24,59.41 47.24,58.12 47.36,58 v48.5,58
  Bottom 0.991: v51.5,56.5 52,56 61.5,56 v62,55.5 | v65,55.5 65.5,56 82.5,56 86.5,60 86.5,61.5 85,63 84.5,63 v71,63
MOTOR_2_OUT  (via drill 0.35)
  Top 0.991: v45,58 45.5,58.5 45.5,59 46,59.5 58,59.5 59.5,58 63,58 64,59 64,67.5 65.5,69 J2.2
  Bottom 0.254: v45,58 41.5,58 41.5,60 IC2.8
MOTOR_3_OUT  (via drill 0.35)
  Top 0.991: v52.5,64.5 54,66 v56,66
  Bottom 0.254: 41.52,65.98 IC2.13
  Bottom 0.991: v56,66 80,66 83,69 J3.1 | v52.5,64.5 43.5,64.5 43,64.5 41.52,65.98
MOTOR_4_OUT
  Bottom 0.254: IC2.18 47.87,69.23 47.87,67.13 49,66
  Bottom 0.991: J3.2 78,69 76.5,67.5 52,67.5 50.37,65.87 49.13,65.87 49,66
MOTOR_VIN  (via drill 0.35)
  Top 0.991: J11.2 59,69.85 59,61.5 J9.1 58.5,61.5 57,63 51,63 49,65 49,66.98 48.92,67.05 48.92,67.41 47.33,69 40,69 39.5,68.5 v39.5,58 | v29.5,59.49 29.5,58.5 C9.+
  Bottom 0.254: 35,59.5 38.5,59.5 39,60 IC2.10
  Bottom 0.991: v39.5,58 36.5,58 35,59.5 v29.51,59.5 v29.5,59.49 26.27,59.49 C8.1
N$1
  Top 0.254: D1.C 14,56 11,53 11,51.5 U$1.30
N$11
  Bottom 0.254: 79.5,5 R1.2 79.05,6.05 80.03,7.03 LED.1 88,7
O1  (via drill 0.35)
  Top 0.254: v57,44 57,30 59,28 K1.3
  Bottom 0.254: v57,44 52.5,44 IC1.18
O2  (via drill 0.35)
  Top 0.254: v65,46 65,30 67,28 K2.3
  Bottom 0.254: v65,46 51.5,46 51.5,44.5 IC1.17
O3  (via drill 0.35)
  Top 0.254: v73.5,47 73.5,29.5 75,28 K3.3
  Bottom 0.254: v73.5,47 50,47 50,44.5 IC1.16
O4  (via drill 0.35)
  Top 0.254: v49,46 54,51 61,51 61,38.5 62,37.5 v62,32.5
  Bottom 0.254: v49,46 48.5,46 48.5,44.5 IC1.15 | v62,32.5 65.5,29 82,29 83,28 K4.3
O5  (via drill 0.35)
  Top 0.254: v51,42.5 57,48.5 59,48.5 59,49.5 K5.3
  Bottom 0.254: v51,42.5 47.5,42.5 47.5,44 IC1.14
O6  (via drill 0.35)
  Top 0.254: v46.5,42.5 48.5,40.5 50,40.5 v50,39.5 | v64,40.5 64,46.5 67,49.5 K6.3
  Bottom 0.254: v46.5,42.5 46,42.5 46,44 IC1.13 | v50,39.5 50.5,40 57.5,40 58,40.5 v64,40.5
O7
  Bottom 0.254: IC1.12 45,44.5 45,48 73.5,48 75,49.5 K7.3
O8  (via drill 0.35)
  Top 0.254: v45,42.5 48,45.5 48,46.5 54.5,53 v54.5,54.5
  Bottom 0.254: v45,42.5 43.5,42.5 43.5,44 IC1.11 | v54.5,54.5 53,54.5 52.5,54 52.5,52.5 71,52.5 72,53.5 82,53.5 83,52.5 83,50 K8.3
PR/SHDN  (via drill 0.35)
  Top 0.254: U3.7 47,21 47,22 47.5,22.5 49,22.5 49,21 U3.5 49.5,20.5 v49.5,18.5 | v9,32.5 8.5,32 8.5,27.5 7.5,26.5 v7.5,18.5 | v21,18.5 21.5,19 21.5,20.5 U2.7 21.5,21 21.5,22.5 23.5,22.5 | 23.5,22.5 23.5,21.5 24,21 U2.5 | 23.5,22.5 v24,23
  Bottom 0.254: v9,32.5 9,34 R4.1 | v21,18.5 v7.5,18.5 | v49.5,18.5 45.5,18.5 44.5,17.5 42.5,17.5 38.5,21.5 25.5,21.5 v24,23
RST
  Top 0.254: J6.1 46.5,55 46.5,51.5 U$1.16
SH_1  (via drill 0.35)
  Top 0.254: v51,37 42,37 38,41 38,48 37.5,48.5 25,48.5 v25,44.5
  Bottom 0.254: v51,37 52.5,37 52.5,35 IC1.1 | U4.15 25,43.19 v25,44.5
SH_2  (via drill 0.35)
  Top 0.254: v36.5,29 34,29 28,35 v28,37.5
  Bottom 0.254: v36.5,29 55,29 55,30.5 54.5,31 48.5,31 48.5,32.5 49,33 51,33 51,34.5 IC1.2 | v28,37.5 26,37.5 U4.1
SH_3  (via drill 0.35)
  Top 0.254: v34,38 32.5,39.5 30,39.5 29.5,39 v29.5,36
  Bottom 0.254: v34,38 34.5,38.5 50,38.5 50,35 IC1.3 | v29.5,36 25.5,36 24.5,37 24.5,37.5 U4.2
SH_4  (via drill 0.35)
  Top 0.254: v36,37.5 33.5,40 29.85,40 29,39.15 29,37 28.5,36.5 28.5,35.5 29,35 v29.5,35
  Bottom 0.254: v36,37.5 48.5,37.5 48.5,35 IC1.4 | v29.5,35 25,35 23.5,36.5 23.5,37.5 U4.3
SH_5  (via drill 0.35)
  Top 0.254: v27.5,30.5 23,35 v23,35.5
  Bottom 0.254: v27.5,30.5 45,30.5 45,32 47.5,34.5 IC1.5 | v23,35.5 22,36.5 22,37.5 U4.4
SH_6  (via drill 0.35)
  Top 0.254: v41,34.5 v41,36.5
  Bottom 0.254: v41,36.5 46,36.5 46,35 IC1.6 | v41,34.5 32.5,34.5 27.5,39.5 21.5,39.5 21,39 21,38 U4.5
SH_7  (via drill 0.35)
  Top 0.254: v33,31.5 32,32.5 v32,38.5
  Bottom 0.254: v33,31.5 44.5,31.5 44.5,34.5 IC1.7 | v32,38.5 30.5,40 21,40 19.5,38.5 19.5,38 U4.6
SH_8  (via drill 0.35)
  Top 0.254: v18.5,39.5 v18.5,33
  Bottom 0.254: v18.5,33 19,32.5 43.5,32.5 43.5,34.5 IC1.8 | v18.5,39.5 18.5,38 18,38 U4.7
SH_CLK  (via drill 0.35)
  Top 0.254: v15.5,44 15,43.5 15,30.5 16.5,29 18,29 18,29.5 19.5,31 23,31 23,26.5 U$1.6 | v84,25.5 84.5,25 84.5,23.5 86.5,23.5 87,24 87,34.5 90,34.5 92,36.5 93.5,36.5 J7.4
  Bottom 0.254: v15.5,44 16,44.5 19.5,44.5 19.5,43 U4.11 | v84,25.5 47.5,25.5 47,25 24.5,25 23.5,26 U$1.6
SH_DATA  (via drill 0.35)
  Top 0.254: v14.5,28 v14.5,45
  Bottom 0.254: v14.5,45 23,45 23,43 U4.14 | v14.5,28 19,28 20.5,26.5 U$1.5
SH_DATA_OUT  (via drill 0.35)
  Top 0.254: v17,30 v17,40 | v54,35 v54,30 | v88,33.5 93.5,33.5 93.5,34 J7.3
  Bottom 0.254: v17,40 17,42.5 U4.9 | v17,30 17.5,29.5 19,29.5 19.5,29 35,29 36,30 v54,30 | v54,35 86.5,35 v88,33.5
SH_LATCH  (via drill 0.35)
  Top 0.254: v19.5,41 19.5,32.5 v18.5,31.5 | v20,30 18.5,28.5 18.5,26.5 U$1.4 | v88,36 90.5,36 93.5,39 J7.5 | v53.5,36 53,35.5 v53,24.5
  Bottom 0.254: v19.5,41 20.5,41 20.5,42.5 U4.12 | v20,30 v18.5,31.5 | v53.5,36 v88,36 | v53,24.5 20,24.5 18.5,26 U$1.4

## Text on the board
tNames: - | + | Ex. Motor / Pwr. | GND | 3V3 | DAC 1 | DAC 2 | GPI 34 | GPI 35 | GPI 36 | GPI 39 | Motor Pwr. / Select | 9-12V | > | > | SDA | SCL | 5V | 3V3 | + | - | 1W | 2A | 2B | 3W | 4A | 4B | 3W | 6A | 6B | 7W | 8A | 8B | GND | 1B | 2B | 3B | 4B | 5B | 6B | 7B | 8B | v 2.0 | 1A | 1B | 2W | 3A | 3B | 4W | 5A | 5B | 6W | 7A | 7B | 8W | GND | 1A | 2A | 3A | 4A | 5A | 6A | 7A | 8A
bNames: * | Bendit_I/O by Anthony T. Marasco | www.benditio.com
bValues: 5V